# EAGLE board BHOnOfreSquareBoard (EAGLE 8.5.2)
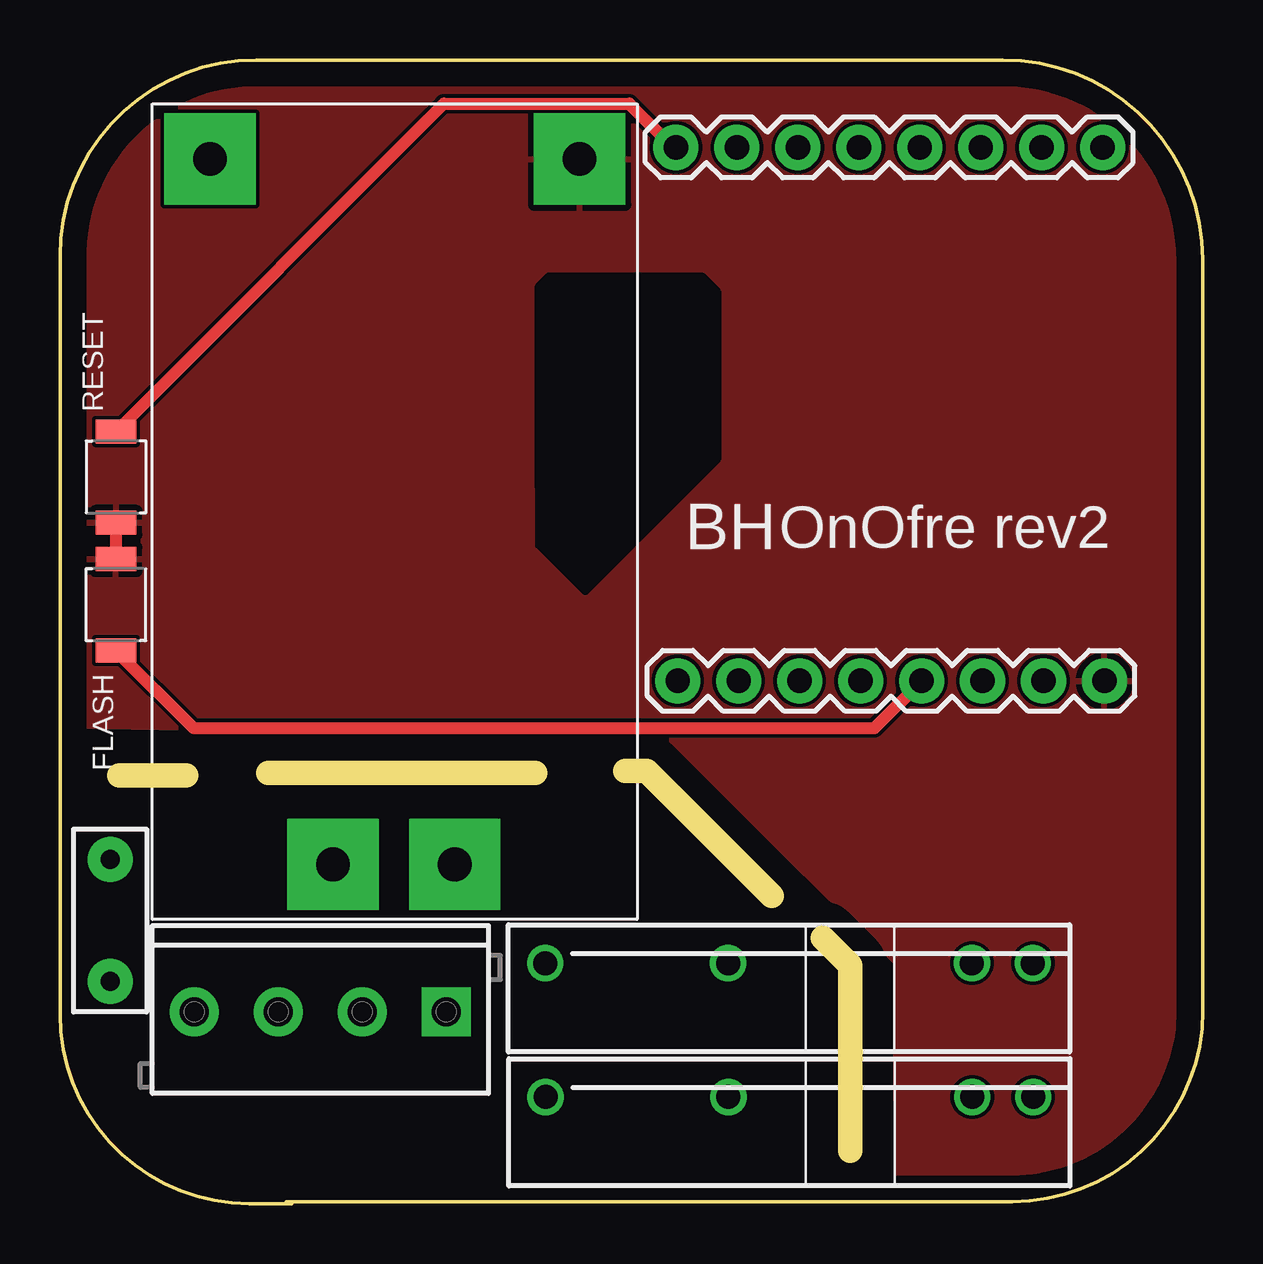
[diagram p0: board, top side]
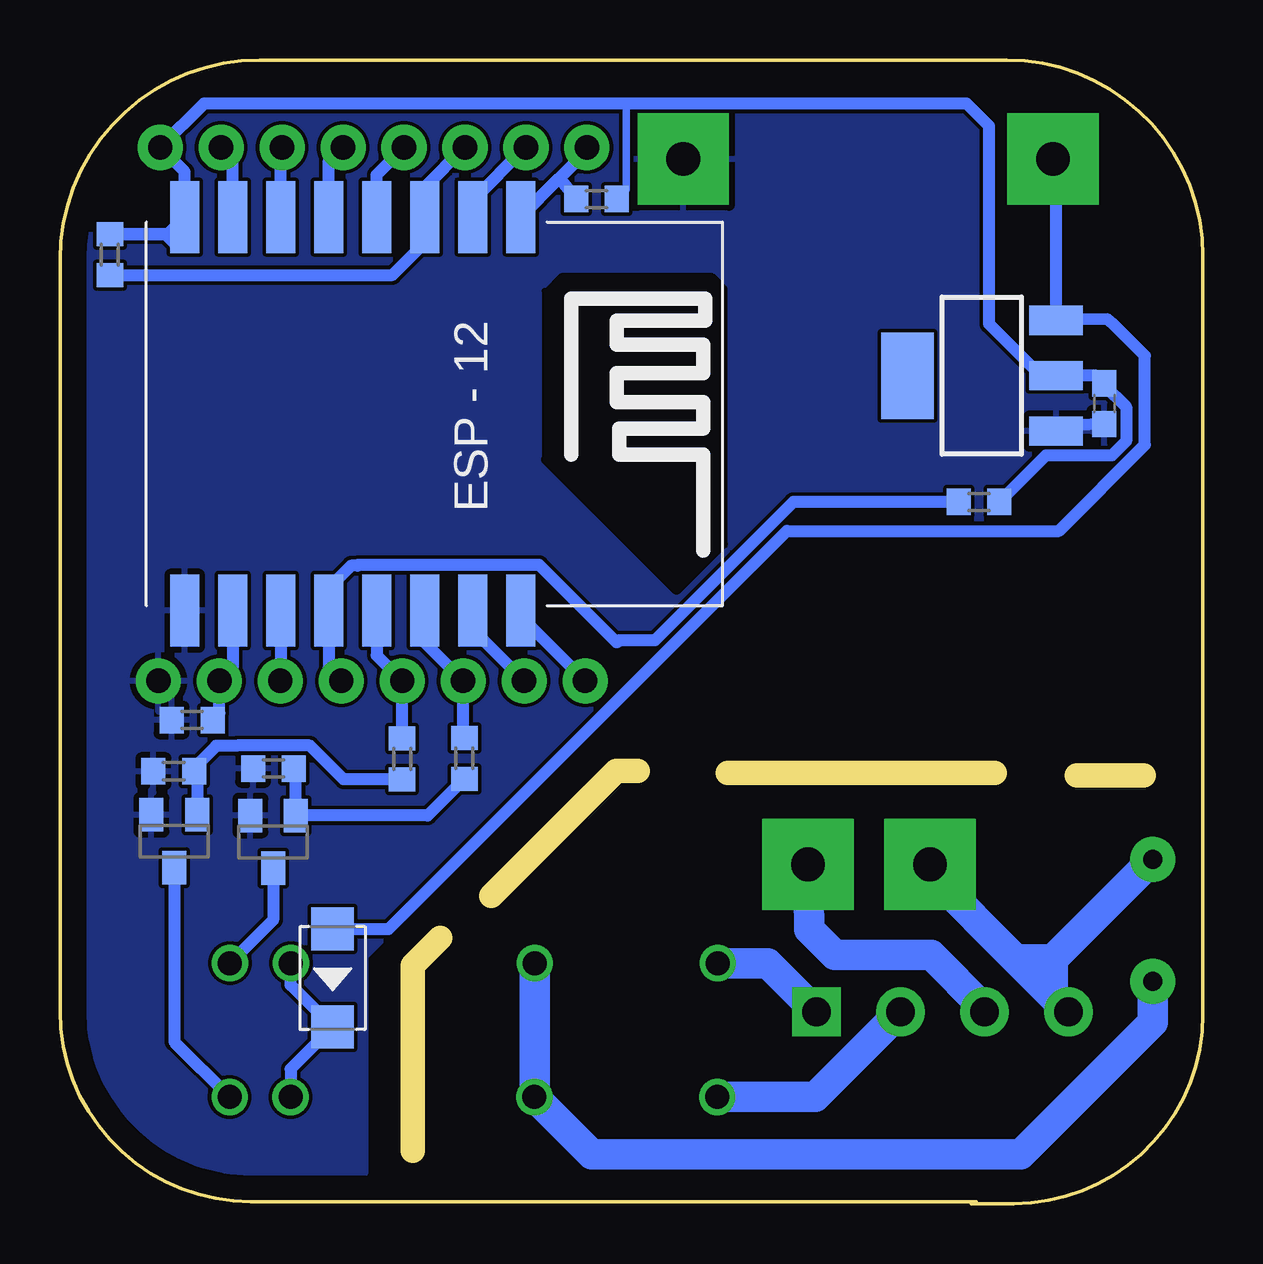
[diagram p1: board, bottom side, seen from below]

Size 47.62 x 47.67 mm. Coordinates in mm from the lower left corner, seen from the top.
Outline: 9.66,0 7.88,0 arc-90 0,7.88 0,39.5 arc-90 8.17,47.67 39.29,47.67 arc-90 47.62,39.34 47.62,8.02 arc-90 39.67,0.07 9.44,0.07
Outline: 32.92,2.21 32.92,9.93 31.78,11.07 31.78,11.07
Outline: 29.65,12.83 24.44,18.04 23.54,18.04
Outline: 19.8,17.94 8.67,17.94
Outline: 5.26,17.85 2.46,17.85
Copper layers (1*16): Top 0.035mm / dielectric 1.5mm / Bottom 0.035mm
Design rules "default": minimum track width 6mil, minimum drill 0.35mm, track to track 6mil, track to pad 6mil, pad to pad 6mil, via to via 6mil, smd to smd 6mil, copper to edge 40mil, drill to drill 6mil, minimum pad ring 10mil, minimum via ring 8mil, stop-mask expansion 4mil, vias tented up to drill 0mil, thermal gap 10mil
Net classes: 1 220V: clearance 2.54 mm

## Footprints (pad centres in the part's own frame; a part is rotated, then mirrored left to right if it is on the bottom)
0603 = smd 1.1 x 1: 1 -0.85,0; 2 0.85,0
DO-214AC = smd 1.8 x 1.77: 1 -2.042,0; 2 2.042,0
PTH = drill 0.8 pad 1.88: P$1 -2.54,0; P$2 2.54,0
SW2-2.6-3.0X2.5X1.2+0.4MM = smd 1 x 1.7: 1 -1.9,0; 2 1.9,0
SCREWTERMINAL-3.5MM-4 = drill 1.2 pad 2.032 square: 1 0,0 | drill 1.2 pad 2.032: 2 3.5,0; 3 7,0; 4 10.5,0
1X08 = drill 1.016 pad 1.88: 1 0,0; 2 2.54,0; 3 5.08,0; 4 7.62,0; 5 10.16,0; 6 12.7,0; 7 15.24,0; 8 17.78,0
OMRON-G3MB-202P-SSR = drill 1: 1 -12.7,0; 2 -5.08,0; 3 5.08,0; 4 7.62,0
SOT23 = smd 1 x 1.4: 1 -0.95,-1.1; 2 0.95,-1.1; 3 0,1.1
R0603 = smd 1 x 1.1: 1 -0.85,0; 2 0.85,0
SOT223 = smd 1.219 x 2.235: 1 -2.311,-3.099; 2 0,-3.099; 3 2.311,-3.099 | smd 3.6 x 2.2: 4 0,3.099
ESP12-SMD = smd 3 x 1.2: ADC -8.3,3.8; CH_PD -8.3,1.8; GND 8.1,-8.2; GPIO0 8.1,-2.2; GPIO2 8.1,-4.2; GPIO4 8.1,1.8; GPIO5 8.1,-0.2; GPIO12 -8.3,-4.2; GPIO13 -8.3,-6.2; GPIO14 -8.3,-2.2; GPIO15 8.1,-6.2; GPIO16 -8.3,-0.2; RESET -8.3,5.8; RXD0 8.1,3.8; TXD0 8.1,5.8; VCC -8.3,-8.2
HLK-PM03 = drill 1.4 pad 3.81 square: +VO 29.4,10.2; -VO 29.4,-5.2; AC1 0,5.08; AC2 0,0

## Placement (x,y rotation side)
C4  100nF  [0603]  4.1,33.34 270 bottom
D3  1N4004  [DO-214AC]  36.26,9.41 270 bottom
F1  FUSE 2A  [PTH]  2.09,11.8 270 top
FLASH  B3U-1000P-2P-SMD  [SW2-2.6-3.0X2.5X1.2+0.4MM]  2.33,24.96 90 top
J1  4p  [SCREWTERMINAL-3.5MM-4]  16.1,7.99 180 top
J6  8p  [1X08]  43.52,21.79 180 top
J7  8p  [1X08]  43.44,44.02 180 top
K1  OMRON-G3MB-202P-SSR2  [OMRON-G3MB-202P-SSR]  32.93,4.44 0 top
K2  OMRON-G3MB-202P-SSR2  [OMRON-G3MB-202P-SSR]  32.92,10.02 0 top
Q1  S8050  [SOT23]  42.86,15.1 180 bottom
Q2  S8050  [SOT23]  38.74,15.07 180 bottom
R1  10k  [R0603]  30.77,18.56 270 bottom
R2  10k  [R0603]  38.72,18.13 0 bottom
R3  10k  [R0603]  42.88,18.02 0 bottom
R4  10k  [R0603]  33.36,18.54 270 bottom
R8  10k  [R0603]  9.32,29.24 0 bottom
R9  10k  [R0603]  45.54,39.56 90 bottom
R10  10k  [R0603]  25.26,41.87 0 bottom
R11  10k  [R0603]  42.11,20.15 180 bottom
RESET  B3U-1000P-2P-SMD  [SW2-2.6-3.0X2.5X1.2+0.4MM]  2.33,30.29 270 top
U1  LM1117  [SOT223]  9.21,34.51 90 bottom
U2  esp12  [ESP12-SMD]  34.22,32.81 270 bottom
U$2  HLK-PM03  [HLK-PM03]  16.45,14.14 90 top

## Library data of the parts
C4 = SparkFun-Capacitors; PROD_ID: CAP-00867
D3 = Seeed-Diode; MPN: 1N4007
F1 = SparkFun-Fuses; PROD_ID: RES-08490
FLASH RESET = Seeed-Switch; MPN: B3U-1000P-2P-SMD
J1 = SparkFun-Connectors; PROD_ID: 2xCONN-08399; SF_ID: 2xPRT-08084
J6 J7 = SparkFun-Connectors; PROD_ID: CONN-08438
K1 K2 = Omron G3MB 202p SSR; MPN: S202S02F; OC_FARNELL: 1618475; OC_NEWARK: 14N9588
Q1 Q2 = semicon-smd-ipc
R1-R4 R8-R11 = resistor
U1 = SparkFun-IC-Power; PROD_ID: VREG-08170
U2 = esp8266modules
U$2 = PowerSocket

## Nets
3V3: C4.1 J7.1 R8.2 R9.2 R10.2 U1.2 U2.VCC
ADC: J7.7 U2.ADC
CH_PD: J7.6 R9.1 U2.CH_PD
FASE: J1.3 U$2.AC2
GND: C4.2 FLASH.2 J6.1 Q1.2 Q2.2 R2.1 R3.1 R11.2 RESET.2 U1.1 U2.GND U$2.-VO
GPIO0: FLASH.1 J6.4 R8.1 U2.GPIO0
GPIO02: J6.3 U2.GPIO2
GPIO04: J6.6 R1.1 U2.GPIO4
GPIO05: J6.5 R4.1 U2.GPIO5
GPIO12: J7.3 U2.GPIO12
GPIO13: J7.2 U2.GPIO13
GPIO14: J7.4 U2.GPIO14
GPIO15: J6.2 R11.1 U2.GPIO15
GPIO16: J7.5 U2.GPIO16
N$1: K1.4 Q1.3
N$2: D3.2 K1.3 K2.3
N$7: Q1.1 R3.2 R4.2
N$9: K2.4 Q2.3
N$13: Q2.1 R1.2 R2.2
NEUTRAL_IN: F1.P$1 J1.4 U$2.AC1
NEUTRAL_IN_FUSED: F1.P$2 K1.2 K2.2
NEUTRAL_ONE_OUT: J1.2 K1.1
NEUTRAL_TWO_OUT: J1.1 K2.1
RESET: J7.8 R10.1 RESET.1 U2.RESET
RX: J6.7 U2.RXD0
TX: J6.8 U2.TXD0
VCC: D3.1 U1.3 U$2.+VO

## Tracks (layer width: path | path; a pad name or v marks a point on that pad's centre or on a via)
3V3
  Bottom 0.305: 24.02,45.85 24.02,42.27 R10.2
  Bottom 0.508: 42.82,39.99 43.24,40.41 R9.2 43.13,40.41 U2.VCC 42.42,43 J7.1 41.62,45.85 24.02,45.85 9.84,45.85 8.9,44.92 8.9,36.67 6.75,34.51 U1.2 4.42,34.51 C4.1 4.1,34.12 3.19,33.21 3.19,31.77 3.79,31.18 6.54,31.18 R8.2
ADC
  Bottom 0.508: U2.ADC 30.42,41.8 J7.7
ANT
  cutout Top: 19.91,29.88 19.91,38.25 20.36,38.69 26.76,38.69 27.43,38.03 27.43,31.02 21.88,25.47 19.92,27.43 19.92,29.87 19.91,29.88 19.91,29.88 19.9,29.87 19.91,29.85 19.92,29.85 19.91,29.84 19.91,29.84 19.91,29.85 19.91,29.86 19.91,29.87 19.91,29.88 19.93,29.85 19.94,29.85
ANT2
  cutout Bottom: 19.92,27.47 19.92,38.15 20.42,38.65 20.45,38.65 26.74,38.65 27.35,38.04 27.43,38.04 27.43,31.07 27.45,31.04 27.45,30.99 21.98,25.52 21.88,25.52 21.8,25.6 19.95,27.45 19.95,27.45 19.93,27.45 19.91,27.47 19.91,27.52 19.92,27.52 19.92,27.48 19.91,27.47 19.91,27.46 19.92,27.45 19.93,27.46 19.93,27.48
CH_PD
  Bottom 0.508: J7.6 32.42,42.34 U2.CH_PD 32.42,40.06 33.77,38.71 R9.1
FASE
  Bottom 1.27: U$2.AC2 16.4,11.42 15.35,10.36 11.32,10.36 9.1,8.14 J1.3
GND
  Top 0.508: FLASH.2 RESET.2
  Top 1.016: FLASH.2 arc90 FLASH.2
  Bottom 0.508: U1.1 5.3,32.45 C4.2 | 21.65,43.82 U$2.-VO
  pour Top (rank 6): 9.58,69.27 -20.5,20.31 25.23,19.48 34.82,10.08 34.87,-13.16 72.16,31.74
  pour Bottom (rank 6): -2.96,50.35 -2.96,21.46 -1.38,19.88 25.31,19.88 25.37,19.82 34.91,10.29 34.91,9.68 34.91,1.26 34.97,1.19 49.04,1.19 49.43,0.8 49.43,49.56 49.17,49.83 -2.4,49.83 -2.96,50.39
GPIO0
  Top 0.508: FLASH.1 5.58,19.82 33.93,19.82 J6.4
  Bottom 0.508: 36.42,24.01 U2.GPIO0 36.42,25.65 35.48,26.59 35.22,26.59 35.19,26.62 27.66,26.62 24.42,23.39 24.41,23.39 24.32,23.47 22.83,23.47 17.06,29.24 R8.1 | 36.42,24.01 36.42,22.31 J6.4 | 36.43,24.01 36.42,24.01
GPIO02
  Bottom 0.508: U2.GPIO2 38.42,21.8 J6.3
GPIO04
  Bottom 0.508: U2.GPIO4 32.42,23.39 J6.6 30.82,19.46 R1.1
GPIO05
  Bottom 0.508: U2.GPIO5 34.42,22.85 J6.5 R4.1
GPIO12
  Bottom 0.508: U2.GPIO12 38.42,43.96 J7.3
GPIO13
  Bottom 0.508: U2.GPIO13 40.42,43.54 J7.2
GPIO14
  Bottom 0.508: U2.GPIO14 36.42,43.42 J7.4
GPIO15
  Bottom 0.508: 40.42,25.65 40.42,25.05 | 40.42,25.05 U2.GPIO15 40.42,22.34 J6.2 40.98,20.44 R11.1 | 40.41,25.07 40.42,25.05
GPIO16
  Bottom 0.508: U2.GPIO16 34.42,42.88 J7.5
N$1
  Bottom 0.508: Q1.3 42.86,6.75 K1.4
N$2
  Bottom 0.508: K2.3 38.01,10.01 38.01,9.11 D3.2 38.01,5.61 K1.3
N$7
  Bottom 0.508: Q1.1 41.91,17.9 R3.2 42.03,18.17 41.12,19.08 40.25,19.08 40.24,19.09 37.2,19.09 35.8,17.69 R4.2
N$9
  Bottom 0.508: Q2.3 38.74,11.82 K2.4
N$13
  Bottom 0.508: R2.2 37.79,18.05 Q2.1 32.31,16.17 R1.2
NEUTRAL_IN
  Bottom 1.27: J1.4 6.24,8.64 | 6.24,8.64 7.71,10.1 | 7.71,10.1 11.32,13.72 U$2.AC1 | F1.P$1 6.24,10.18 | 6.24,10.18 6.24,8.64 | 6.24,10.18 7.62,10.18 7.71,10.1
NEUTRAL_IN_FUSED
  Bottom 1.27: F1.P$2 2.09,7.54 7.58,2.05 25.46,2.05 K1.2 27.84,4.45 K2.2
NEUTRAL_ONE_OUT
  Bottom 1.27: K1.1 16.15,4.44 J1.2
NEUTRAL_TWO_OUT
  Bottom 1.27: K2.1 18.13,10.02 J1.1
RESET
  Top 0.508: J7.8 25.55,44.02 23.72,45.85 16,45.85 RESET.1
  Bottom 0.508: U2.RESET 26.81,42.73 | 26.81,42.73 25.66,43.87 J7.8 | R10.1 26.81,42.73
RX
  Bottom 0.508: U2.RXD0 30.42,23.93 J6.7
TX
  Bottom 0.508: U2.TXD0 28.42,24.47 J6.8
VCC
  Bottom 0.508: U$2.+VO 6.11,43.49 U1.3 3.98,36.86 3.74,36.67 2.42,35.34 2.42,31.62 5.99,28.04 17.33,28.04 33.92,11.45 D3.1

## Text on the board
tNames: BH | OnOfre rev2